# Altium PCB Pcb_UPS_RPI_V3_GLC_RULES.PcbDoc
Units mm, origin at the board's own origin, x right, y up, seen from the top; angles counter-clockwise.
Board outline 100 x 70 mm, 2 copper layers (Top Layer, Bottom Layer); 40 components, 28 nets, 108 pads, 10 vias.
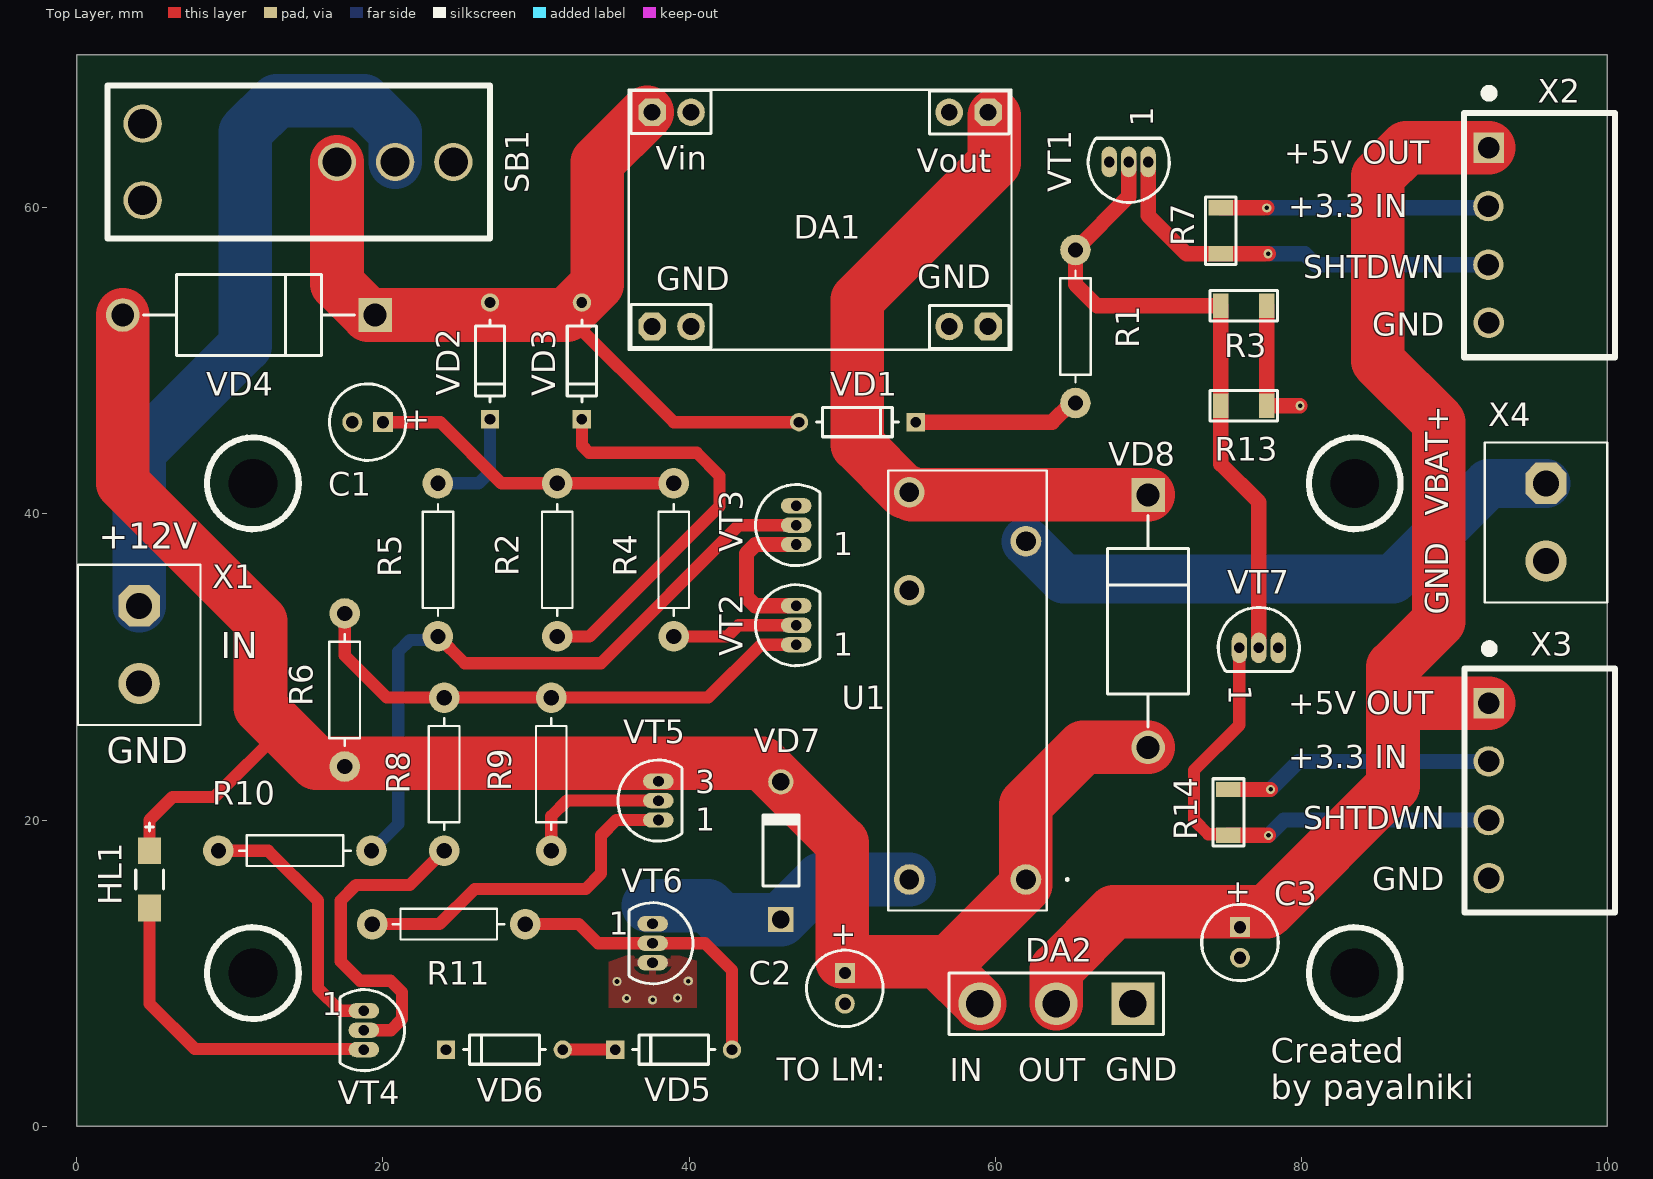
[diagram p0: Top Layer view]
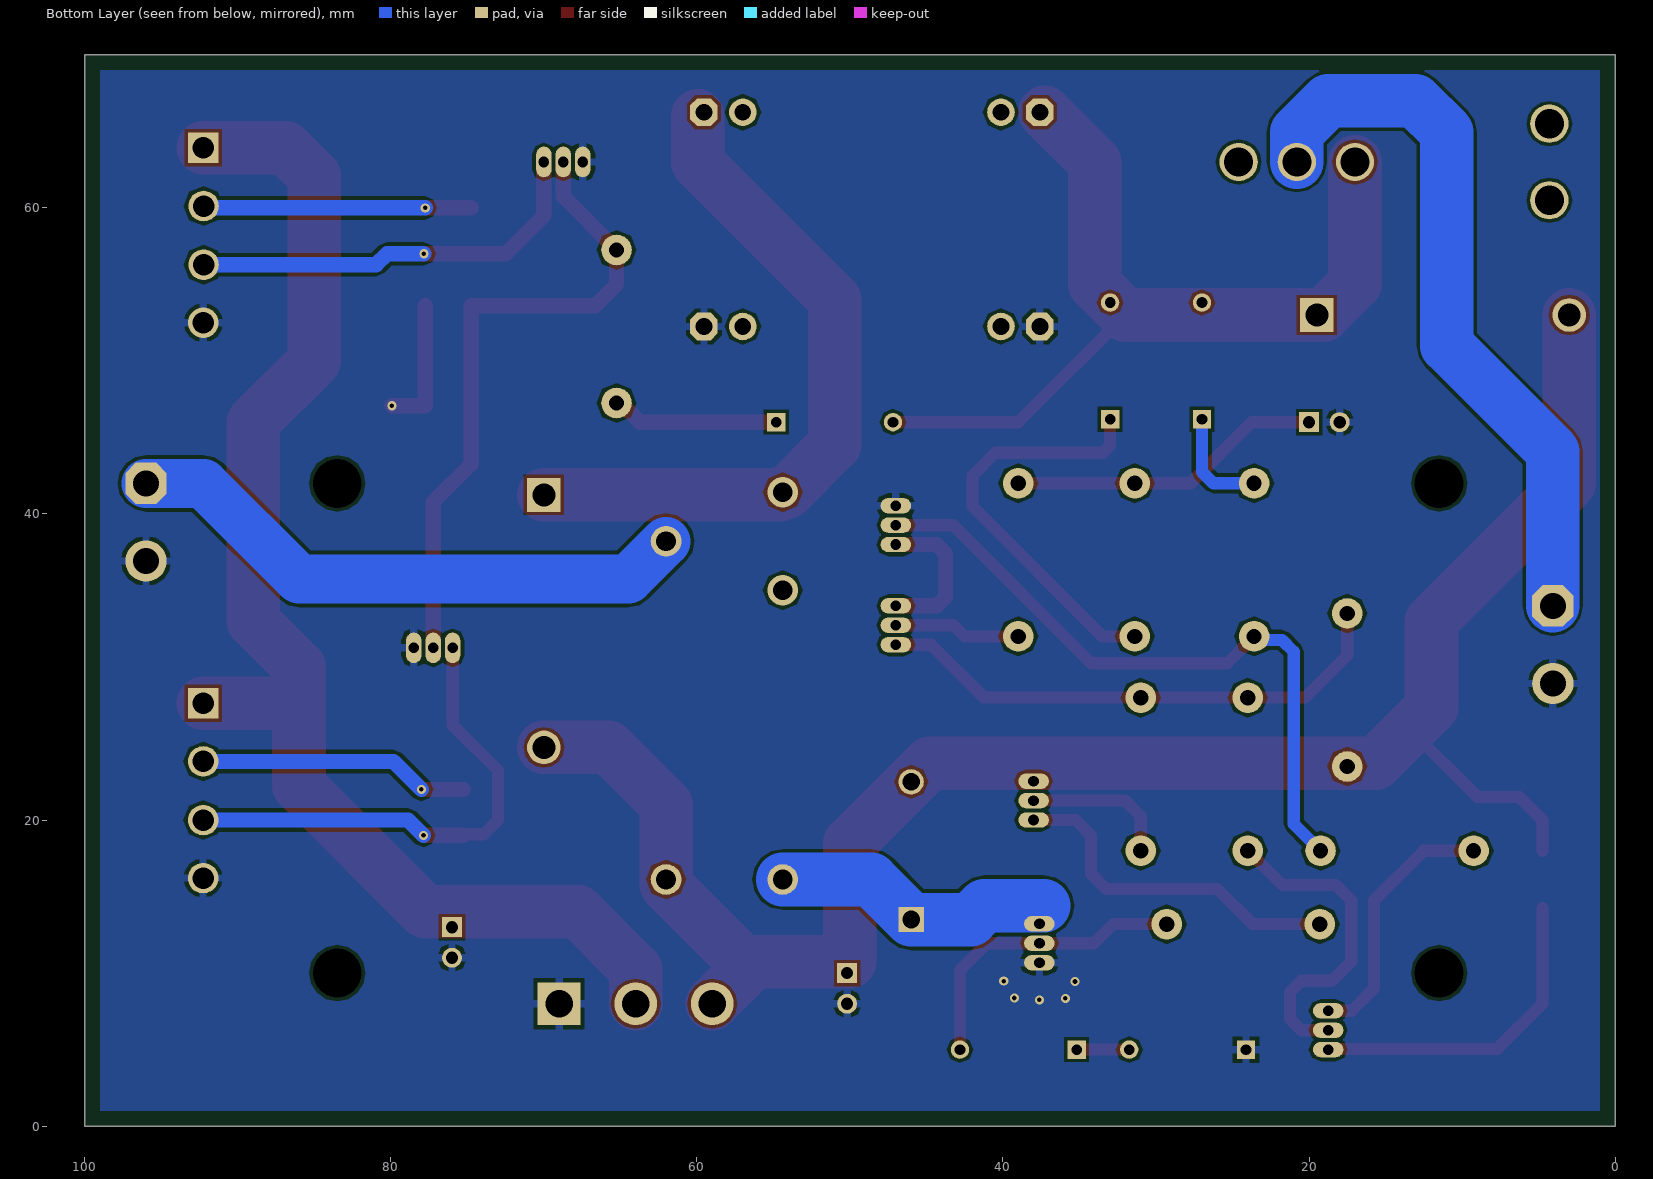
[diagram p1: Bottom Layer view, seen from below]

## Layer stack, top to bottom
Top Solder: solder mask 0.0102, Solder Resist, Dk 3.5
Top Layer: signal copper 0.0356
Dielectric 1: dielectric 0.32, FR-4, Dk 4.8
Bottom Layer: signal copper 0.0356
Bottom Solder: solder mask 0.0102, Solder Resist, Dk 3.5

## Board outline
0,0 100,0 100,70 0,70

## Design rules (kind name [scope] priority, off if disabled: settings)
BoardOutlineClearance [All] p1: gap=0.2 ignorepadtopadclearanceinfootprint=FALSE except(0.4: Arc-SplitBarrior Arc-SplitContinuation Track-SplitBarrior Track-SplitContinuation SMDPad-SplitBarrior SMDPad-SplitContinuation THPad-SplitBarrior THPad-SplitContinuation Via-SplitBarrior Via-SplitContinuation Fill-SplitBarrior Fill-SplitContinuation Poly-SplitBarrior Poly-SplitContinuation Region-SplitBarrior Region-SplitContinuation Text-SplitBarrior Text-SplitContinuation)
Clearance "Clearance Bottom Layer" [OnLayer('Bottom Layer')] p1: gap=0.203 ignorepadtopadclearanceinfootprint=TRUE except(0.254: Arc-Text Track-Text SMDPad-Text THPad-Text Via-Text Fill-Text Poly-Text Region-Text Text-Text)
Clearance "Clearance Top Layer" [OnLayer('Top Layer')] p2: gap=0.203 ignorepadtopadclearanceinfootprint=TRUE except(0.254: Arc-Text Track-Text SMDPad-Text THPad-Text Via-Text Fill-Text Poly-Text Region-Text Text-Text)
Clearance [All] p3: gap=0.2 ignorepadtopadclearanceinfootprint=FALSE except(0.089: Arc-Arc Arc-Track Arc-SMDPad Track-Track Track-SMDPad SMDPad-SMDPad; 0.127: Arc-Via Track-Via SMDPad-Via THPad-Via Via-Via; 0.254: Arc-Text Track-Text SMDPad-Text THPad-Text Via-Text Fill-Text Poly-Text Region-Text Text-Text)
HoleSize [All] p1: absolutevalues=TRUE maxlimit=6.3 minlimit=0.2 maxpercent=80.000 minpercent=20.000
MinimumAnnularRing [All] p1: minimumring=0.076
MinimumSolderMaskSliver [All] p1: minsoldermaskwidth=0.05
PolygonConnect PolygonConnect_1 [All] p1: thpad.connectstyle=Relief thpad.reliefconductorwidth=0.508 thpad.reliefentries=4 thpad.polygonreliefangle="90 Angle" thpad.airgapwidth=0.254 smdpad.connectstyle=Relief smdpad.reliefconductorwidth=0.508 smdpad.reliefentries=4 smdpad.polygonreliefangle="90 Angle" smdpad.airgapwidth=0.254 via.connectstyle=Direct via.reliefconductorwidth=0.508 via.reliefentries=4 via.polygonreliefangle="90 Angle" via.airgapwidth=0.254
RoutingCorners [All] p1: cornerstyle=Round minsetback=2.54 maxsetback=2.54
RoutingVias [All] p1: holewidth=0.5 width=1 viastyle="Through Hole" minholewidth=0.2 minwidth=0.45 maxholewidth=1 maxwidth=2
SilkToSilkClearance [All] p1: silktosilkclearance=0.1
SilkToSolderMaskClearance [IsPad] p1: minsilkscreentomaskgap=0.1 clearancetoexposedcopper=TRUE
SolderMaskExpansion [All] p1: expansion=0.102 istentingtop=FALSE
Width [All] p1: maxlimit=3.5 minlimit=0.089 preferedwidth=0.8 minimp=50.000000 maximp=50.000000 favimp=50.000000
25 further rules are at their usual default settings.

## Components (designator, comment, footprint, x,y, rotation, side; value= is the part's Value field where it differs from the comment)
C1 "" "CAP 5*11" 19,46 r180 top value=47μF
C2 "" "CAP 5*11" 50.184,9 r270 top value=10μF
C3 "" "CAP 5*11" 76,12 r270 top value=10μF
DA1 "Зарядник батарейки" "Зарядник батарейки" 36.066,50.726 r0 top
DA2 "LM1084IT-5.0" Под_провода_для_LM 64,8 r180 top
HL1 "=Valuemanufacturerpartnumber" "LED 1206" 4.75,16.125 r270 top
R1 "" Резисторы 65.25,57.25 r270 top value=39K
R2 "" Резисторы 31.389,42 r270 top value=22K
R3 "" "RES: 1206" 76.25,53.596 r0 top value=6K8
R4 "" Резисторы 39,42 r270 top value=470K
R5 "" Резисторы 23.592,42 r270 top value=1M
R6 "" Резисторы 17.5,33.5 r270 top value=10K
R7 "" "RES: 1206" 74.75,58.5 r90 top value=4K7
R8 "" Резисторы 24,28 r270 top value=10K
R9 "" Резисторы 31,28 r270 top value=10K
R10 "" Резисторы 19.25,18 r180 top value=10K
R11 "" Резисторы 29.3,13.2 r180 top value=2K2
R13 "" "RES: 1206" 76.25,47.072 r0 top value=6K8
R14 "" "RES: 1206" 75.25,20.5 r90 top value=4K7
SB1 "MTS-102-C4" MTS-102-C4 17,63 r0 top
U1 "RY610012" RELAY-SPDT_3.2mm 62.013,16.116 r180 top
VD1 "" "1N4148 DO-35" 51,46 r180 top
VD2 "" "1N4148 DO-35" 27,50 r90 top
VD3 "" "1N4148 DO-35" 33,50 r90 top
VD4 "" "Диод Шоттки SR5100" 19.496,53 r180 top
VD5 "" "1N4148 DO-35" 39,5 r0 top
VD6 "" "1N4148 DO-35" 27.937,5 r0 top
VD7 "#NAME?" "1N4001 DO-41" 46,18 r90 top
VD8 "" "Диод Шоттки SR5100" 70,41.244 r270 top
VT1 "#NAME?" TO92 68.73,63 r90 top
VT2 "#NAME?" TO92 47,32.73 r0 top
VT3 "#NAME?" TO92 47,39.27 r0 top
VT4 "#NAME?" TO92 18.75,6.27 r180 top
VT5 "#NAME?" TO92 38,21.27 r0 top
VT6 "#NAME?" TO92 37.62,11.95 r180 top
VT7 "#NAME?" TO92 77.23,31.25 r270 top
X1 "Питание с БП" KLS2-EDV-5.08-02P-4 4.075,34 r270 top
X2 "ECH381R-04P" "ECH381R-04P (KLS2-EDR-3.81-04P-4)" 92.25,58.215 r270 top
X3 "ECH381R-04P" "ECH381R-04P (KLS2-EDR-3.81-04P-4)" 92.265,21.924 r270 top
X4 "" KLS2-EDV-5.08-02P-4 96,42 r270 top

## Footprints (in the part's own frame and the unit in brackets; to place one, negate y for a bottom-side part, rotate by r counter-clockwise, add the part's x,y. Pads: shape width x height; smd on the part's side, far side on the other; paste and mask are expansions set on the pad)
"1N4001 DO-41" [mm] "2-Leads, Axial Lead, Body 4.635x2.36mm, Pin Spacing 9mm"
  rect 1.65x1.65 hole 1.15: 1(-4.5,0)
  round 1.65 hole 1.15: 2(4.5,0)
  silkscreen extent -2.32,-1.18 2.32,1.18, body extent -4.93,-1.18 4.93,1.18, height 2.35
"1N4148 DO-35" [mm]
  round 1.2 hole 0.7 paste-1000 mask+0: 1(3.813,0)
  rect 1.2x1.2 hole 0.7 paste-1000 mask+0: 2(-3.813,0)
  silkscreen extent -2.68,-0.95 2.68,0.95, body extent -4.51,-1.05 4.51,1.05, height 0.25
"CAP 5*11" [mm] "THD, 2-Leads, Dia 5mm, Body Length 11mm"
  rect 1.3x1.3 hole 0.8: 1(-1,0)
  round 1.3 hole 0.8: 2(1,0)
  silkscreen extent -2.5,-2.5 2.5,2.5, body extent -2.5,-2.5 2.5,2.5, height 12
"ECH381R-04P (KLS2-EDR-3.81-04P-4)" [mm]
  rect 2x2 hole 1.4: 1(-5.715,0)
  round 2 hole 1.4: 2(-1.906,-0.015) 3(1.924,-0.015) 4(5.715,0)
  silkscreen extent -9.47,-1.6 7.98,8.25
KLS2-EDV-5.08-02P-4 [mm]
  oct 2.7x2.7 hole 1.7: 1(0,0)
  round 2.7 hole 1.7: 2(5.08,0)
  silkscreen extent -2.68,-4 7.78,4
"LED 1206" [mm]
  rect 1.75x1.5 smd paste+0 mask+0: 1(-1.875,0) 2(1.875,0)
  silkscreen extent -3.67,-0.9 0.63,0.9, body extent -2.85,-1 2.85,1, height 0.25
MTS-102-C4 [mm]
  round 2.5 hole 1.9: 1(3.8,0) 2(0,0) 3(7.6,0) ""(-12.7,-2.5) ""(-12.7,2.5)
  silkscreen extent -15,-5 10,5
RELAY-SPDT_3.2mm [mil]
  round 79 hole 51 mask+4.02: 11(0,-870.08) 12(300,-744.09) 14(300,-996.06) A1(300,0)
  round 79 hole 51 paste+0 mask+4.02: A2(0,0)
  silkscreen extent -109,-1052 354,80
"RES: 1206" [mm]
  rect 1x1.6 smd: 1(-1.5,0) 2(1.5,0)
  silkscreen extent -2.2,-1 2.2,1, body extent -1.65,-0.8 1.55,0.8, height 0.47
TO92 [mm] "TO, Flat Index; 3 In-Line, Axial Leads; Body Dia. 4.8mm; Leads 0.51 x 0.51 mm (max)"
  oval 2x1 hole 0.7: 1(0,-1.27) 2(0,0) 3(0,1.27)
  silkscreen extent -2.65,-2.65 1.55,2.65, body extent -2.7,-2.7 1.6,2.7, height 10
"Диод Шоттки SR5100" [mm]
  rect 2.2x2.2 hole 1.5 paste-1000 mask+0: 1(0,0)
  round 2.2 hole 1.5 paste-1000 mask+0: 2(16.496,0)
  silkscreen extent 1.35,-2.65 15.15,2.65, body extent -1.05,-2.75 17.55,2.75, height 0.25
"Зарядник батарейки" [mm] "Ставится четыремя выводами на розетки PBS-02 или просто запаивается в отверстия"
  oct 1.8x1.8 hole 1.1: 1(1.524,15.524) 2(1.524,1.524) 3(23.474,15.524) 4(23.474,1.524)
  round 1.8 hole 1.1: ""(4.064,1.524) ""(4.064,15.524) ""(20.934,1.524) ""(20.934,15.524)
  silkscreen extent 0,0 25,17
Под_провода_для_LM [mm]
  rect 2.8x2.8 hole 1.8: 1(-5,0)
  round 2.8 hole 1.8: 2(0,0) 3(5,0)
  silkscreen extent -7,-2 7,2
Резисторы [mm]
  round 2 hole 1: 1(0,0) 2(10,0)
  silkscreen extent 1.35,-1 8.65,1

## Part data
C1 C2 C3: library part "POLAR CAPACITOR"
HL1: library part LED_single
R1 R2 R3 R4 R5 R6 R7 R8 R9 R10 R11 R13 R14: library part RESISTOR
U1: "No Description Available", Built_By=EMA_UL_Team, Copyright="Copyright (C) 2016 Accelerated Designs. All rights reserved", Manufacturer_Part_Number=RY610012, RefDes=RefDes, SourceLibrary=Tyco_2012-1-03, Type=DEV, Vendor="TE Connectivity"
VD1 VD2 VD3 VD5 VD6: library part 1N4148, PartNumber=1N4148
VD4 VD8: library part SR5100, Manufacturer="Diodes Incorporated", Package=DO-27, PartNumber=SR5100
VD7: library part 1N4001, Current=150mA, Manufacturer="Micro Commercial", Package=SOD-323, Temperature=-55...+150°C, Voltage=75V, VoltageDrop=1V, HelpURL=https://www.digikey.com/product-detail/en/micro-commercial-co/1N4148WX-TP/1N4148WXTPMSCT-ND/717312, PartNumber=1N4001, RecoveryTime=4ns, TypeDiode="Single diode", ValueManufacturerPartNumber=#NAME?
VT1 VT2 VT3 VT6 VT7: library part BC547, CurrentCE=100mA, CurrentGain=420, Frequency=100MHz, Manufacturer="ON Semiconductor", MaxPower=300mW, Package=SOT-23, Temperature=-55...+125°C, VoltageCE=45V, VoltageSaturation=0.6V, HelpURL=https://www.digikey.com/product-detail/en/on-semiconductor/BC847CLT1G/BC847CLT1GOSCT-ND/917836, PartNumber=BC547, TypeTransistor="NPN transistor", ValueManufacturerPartNumber=#NAME?
VT4 VT5: library part BC557, CurrentCE=100mA, CurrentGain=220, Frequency=100MHz, Manufacturer="ON Semiconductor", MaxPower=300mW, Package=SOT-23, Temperature=-55...+125°C, VoltageCE=45V, VoltageSaturation=0.65V, HelpURL=https://www.digikey.com/product-detail/en/on-semiconductor/BC857BLT3G/BC857BLT3GOSCT-ND/2704963, PartNumber=BC557, TypeTransistor="PNP transistor", ValueManufacturerPartNumber=#NAME?
X1: library part "CONNECTOR 2 PIN"
X2 X3: "4-pin R connector"
X4: library part "Держатель батарейки"

## Free pads (board coordinates)
  round 1 hole 3.2 unplated: K1(11.5,10) K2(11.5,42) K3(83.5,42) K4(83.5,10)

## Via types
v1: diameter 0.6, hole 0.3, Top Layer to Bottom Layer, 10 vias

## Nets (pads, with @x,y where several pads share a name; then routed paths per layer and width w, separated by ;. In a path a pad name is that pad's centre, name@x,y a point inside that pad or via, vN(x,y) a via of type N, cw(c..) or ccw(c..) an arc to the next point about the centre after c; other vN are vias at no path point)
3.3V_IN1: R7.2 X2.2 | length 17.5
  Top Layer w1: R7.2 v1(77.75,60)
  Bottom Layer w1: v1(77.75,60) 92.114,60 X2.2
3.3V_IN2: R14.2 X3.2 | length 17.9
  Top Layer w1: R14.2 v1(78,22) ; X3.2@92.17,23.75 X3.2
  Bottom Layer w1: v1(78,22) 79.83,23.83 X3.2
5V_OUT: C3.1 DA2.2 X2.1 X3.1 | length 86.2
  Top Layer w3.5: DA2.2 64,10.25 67.75,14 77.75,14 86,22.25 86,27.639 ; X2.1 86.875,63.93 85,62.055 85,50 89,46 89,33 86,30 86,27.639 ; X3.1 86,27.639
GND: C1.2 C2.2 C3.2 DA1.2 DA1.4 DA2.1 R3.2 R13.2 VD6.2 VT1.3 VT3.3 VT6.3 VT7.3 X1.2 X2.4 X3.4 X4.2 | length 8.7
  Top Layer w1: R3.2 R13.2 v1(79.928,47.072)
  other v1: 37.62,8.25 35.92,8.35 39.256,8.376 35.295,9.45 39.945,9.475
"HIGH CURRENT": C2.1 DA2.3 HL1.1 R6.2 U1.A2 VD4.2 VD7.2 VD8.2 VT5.3 | length 124.5
  Top Layer w0.8: HL1.1 4.75,20 6.25,21.5 9,21.5 13.432,25.932
  Top Layer w3.5: VD4.2 3,42 12,33 12,27.363 13.432,25.932 15.64,23.723 44.777,23.723 VD7.2 50,18.5 50,10.75 56.25,10.75 DA2.3 ; 56.625,10.375 62.013,15.763 62.013,21.013 65.748,24.748 VD8.2
NetC1_1: C1.1 R2.1 R4.1 | length 20.7
  Top Layer w0.8: C1.1 23.75,46 27.75,42 R2.1 R4.1
NetDA1_1: DA1.1 SB1.2 VD1.1 VD2.1 VD3.1 VD4.1 | length 57.3
  Top Layer w0.8: 32,53 39,46 VD1.1
  Top Layer w3.5: SB1.2 17,55.05 19.05,53 27,53 32,53 34,55 34,62.973 DA1.1@37.277,66.25
NetDA1_3: DA1.3 U1.14 VD8.1 | length 45.6
  Top Layer w3.5: DA1.3@59.938,66.024 59.938,62.938 51,54 51,44.541 54.125,41.416 U1.14 54.56,41.25 69.994,41.25 VD8.1
NetHL1_2: HL1.2 VT4.3 | length 21.5
  Top Layer w0.8: HL1.2 4.75,8 7.712,5.038 VT4.3@18.753,5.038
NetR1_1: R1.1 R3.1 R13.1 VT1.2 VT7.2 | length 42.9
  Top Layer w1: VT1.2 68.73,60.73 R1.1 65.25,55 66.654,53.596 R3.1 R13.1 74.75,43.25 77.23,40.77 VT7.2
NetR1_2: R1.2 VD1.2 | length 11.1
  Top Layer w1: VD1.2@54.894,46.081 VD1.2 63.729,46 64.979,47.25 R1.2
NetR2_2: R2.2 VD3.2 | length 27.7
  Top Layer w0.8: R2.2 33.5,32 42,40.5 42,42.5 40.5,44 33.469,44 33,44.469 VD3.2
NetR4_2: R4.2 VT2.2 | length 8.3
  Top Layer w0.8: R4.2 42.5,32 43.23,32.73 VT2.2
NetR5_1: R5.1 VD2.2 | length 7.2
  Bottom Layer w0.8: R5.1 26.25,42 27,42.75 VD2.2
NetR5_2: R5.2 R10.1 VT3.2 | length 44.6
  Top Layer w0.8: R5.2 25.342,30.25 34.25,30.25 43.27,39.27 VT3.2
  Bottom Layer w0.8: R10.1 21,19.75 21,31 21.77,31.77 23.363,31.77 R5.2
NetR6_1: R6.1 R8.1 R9.1 VT2.1 | length 34.8
  Top Layer w0.8: R6.1 17.5,30.75 20.25,28 R8.1 R9.1 41.25,28 44.71,31.46 VT2.1
NetR8_2: R8.2 VT4.2 | length 21.5
  Top Layer w0.8: VT4.2 20.52,6.27 21.25,7 21.25,8.75 20.5,9.5 18.5,9.5 17.25,10.75 17.25,14.75 18.25,15.75 21.75,15.75 R8.2
NetR9_2: R9.2 VT5.2 | length 9.7
  Top Layer w0.8: R9.2 31,20.25 32.02,21.27 VT5.2
NetR10_2: R10.2 VT4.1 | length 17.2
  Top Layer w0.8: R10.2 12.5,18 15.75,14.75 15.75,9 17.21,7.54 VT4.1
NetR11_1: R11.1 VD5.1 VT6.2 | length 19.9
  Top Layer w0.8: R11.1 32.8,13.2 34.05,11.95 VT6.2 41.05,11.95 42.813,10.187 VD5.1
NetR11_2: R11.2 VT5.1 | length 23
  Top Layer w0.8: R11.2 23.7,13.2 26,15.5 33.25,15.5 34.25,16.5 34.25,19 35.25,20 VT5.1
NetSB1_1: SB1.1 X1.1 | length 47.3
  Bottom Layer w3.5: X1.1 4.075,44.075 11,51 11,64.95 13.05,67 18.75,67 20.8,64.95 SB1.1
NetU1_11: U1.11 X4.1 | length 37.6
  Bottom Layer w3.2: U1.11 64.48,35.75 86,35.75 92.25,42 X4.1
NetU1_A1: U1.A1 VD7.1 VT6.1 | length 18.5
  Bottom Layer w3.5: 37.33,14.403 41.214,14.403 42.117,13.5 VD7.1 48.616,16.116 U1.A1
NetVD5_2: VD5.2 VD6.1 | length 3.6
  Top Layer w0.8: VD6.1 VD5.2
  Top Layer w1: VD6.1 VD6.1@31.788,4.962 ; VD5.2@35.087,4.9 VD5.2
NetVT2_3: VT2.3 VT3.1 | length 9.3
  Top Layer w1: VT2.3@46.5,34 44.336,34 43.75,34.586 43.75,37.414 44.336,38 VT3.1
SDN_SIG_1: R7.1 VT1.1 X2.3 | length 27.1
  Top Layer w1: VT1.1 70,59.5 72.5,57 R7.1 75.5,57 v1(77.839,57) ; X2.3@92.194,56.25 X2.3
  Bottom Layer w1: v1(77.839,57) 80.25,57 80.959,56.291 X2.3
SDN_SIG_2: R14.1 VT7.1 X3.3 | length 32.6
  Top Layer w0.8: R14.1 75.176,19.074 73.926,19.074 73,20 73,23.25 75.96,26.21 VT7.1
  Top Layer w1: R14.1 v1(77.863,19)
  Bottom Layer w1: v1(77.863,19) 78.863,20 X3.3
pads on no net: DA1. SB1. SB1.3 U1.12

## Polygon pours and split planes (outlines as drawn)
GND on Bottom Layer "GND_L02_P000" (solid, pour order 0): 1,69 99,69 99,1 1,1
GND on Top Layer "GND_L01_P001" (solid, pour order 1): 35.82,11.15 39.42,11.15 40.519,10.812 40.519,7.75 34.77,7.75 34.77,10.73

## Silkscreen, mask and mechanical layers (free items; w line width, h text height)
Top Overlay:
  circle w0.4: c83.5,42 r3
  circle w0.4: c11.5,42 r3
  circle w0.4: c83.5,10 r3
  circle w0.4: c11.5,10 r3
  text "+5V OUT" at 78.9,62.9 h1.5
  text "+3.3 IN" at 79.15,59.4 h1.5
  text "SHTDWN" at 80.15,55.4 h1.5
  text "GND" at 84.65,51.65 h1.5
  text "VBAT+" at 89.6,39.9 h1.5 r90
  text "+12V" at 1.419,37.731 h1.7
  text "GND" at 89.6,33.4 h1.5 r90
  text "IN" at 9.402,30.572 h1.7
  text "+5V OUT" at 79.15,26.9 h1.5
  text "GND" at 1.961,23.72 h1.7
  text "+3.3 IN" at 79.15,23.4 h1.5
  text "SHTDWN" at 80.15,19.4 h1.5
  text "GND" at 84.65,15.4 h1.5
  text "TO LM:" at 45.725,2.975 h1.5
  text "GND" at 67.2,2.975 h1.5
  text "IN" at 57.025,2.925 h1.5
  text "OUT" at 61.525,2.925 h1.5
  text "Created  / by payalniki" at 78,1.751 h1.6
Mechanical 15:
  the board outline again, w0.2

## Text inside footprints (layer, text, board x,y; h text height)
C1: Top Overlay "+" at 23.08,46.737 h1.5 r180
C2: Top Overlay "+" at 49.459,13.35 h1.5 r270
C3: Top Overlay "+" at 75.25,16.125 h1.5 r270
DA1: Top Overlay "GND" at 37.867,54.614 h1.52; Top Overlay "GND" at 54.917,54.734 h1.52; Top Overlay "Vout" at 54.896,62.328 h1.52; Top Overlay "Vin" at 37.819,62.505 h1.52
VT1: Top Overlay "1" at 70.336,65.288 h1.5 r90
VT2: Top Overlay "1" at 49.421,30.751 h1.5
VT3: Top Overlay "1" at 49.421,37.291 h1.5
VT4: Top Overlay "1" at 16,7.25 h1.5
VT5: Top Overlay "3" at 40.421,21.737 h1.5; Top Overlay "1" at 40.421,19.291 h1.5
VT6: Top Overlay "1" at 34.75,12.5 h1.5
VT7: Top Overlay "1" at 75.251,28.829 h1.5 r270